# Altium PCB PCB_modified.PcbDoc
Units mil, origin at the board's own origin, x right, y up, seen from the top; angles counter-clockwise.
Board outline 3622.05 x 3622.05 mil, 2 copper layers (Top Layer, Bottom Layer); 1 components, 3 nets, 5 pads, 0 vias.
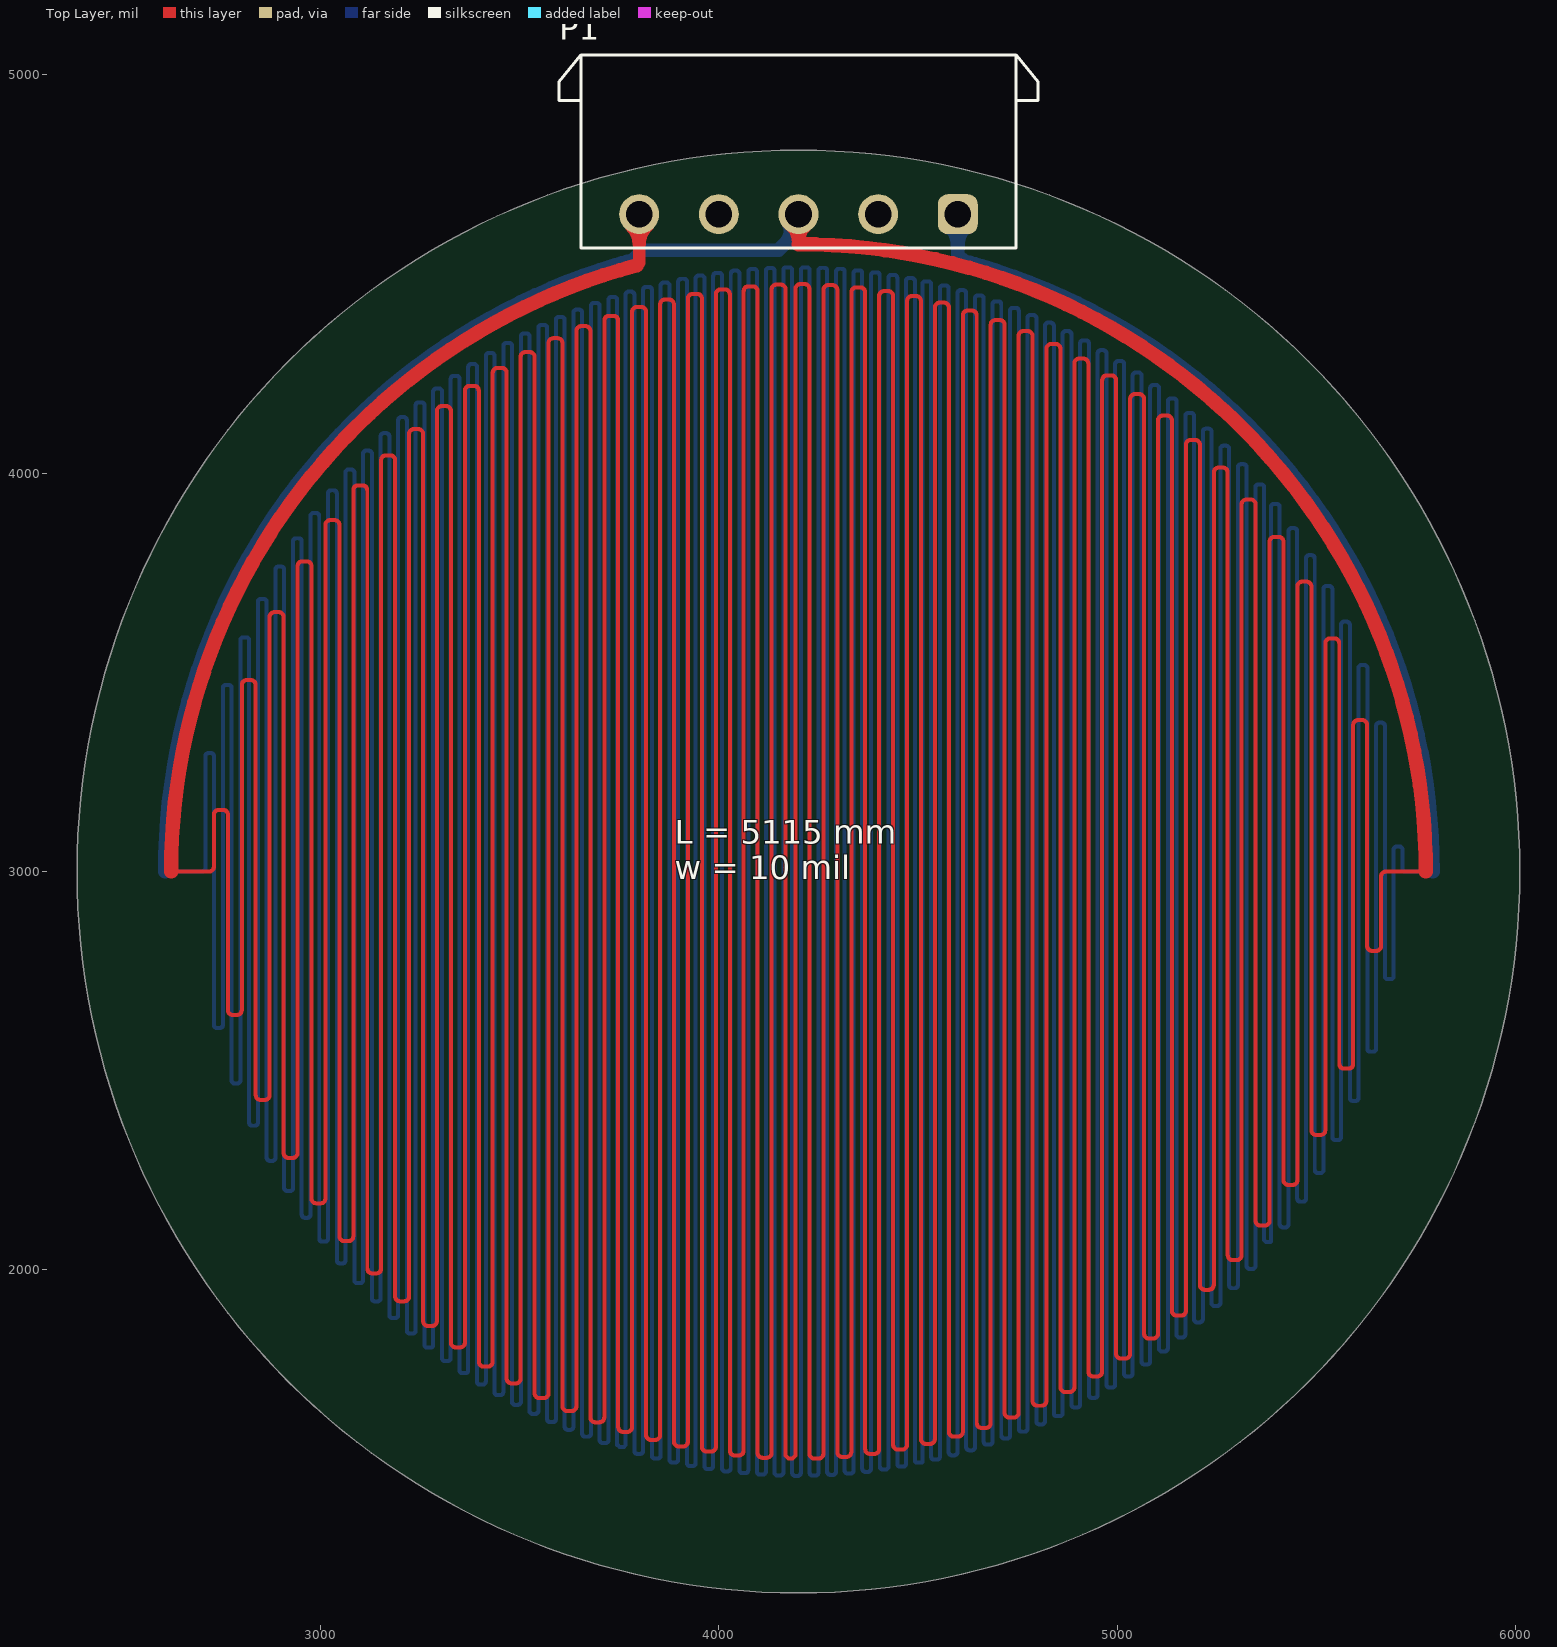
[diagram p0: Top Layer view]
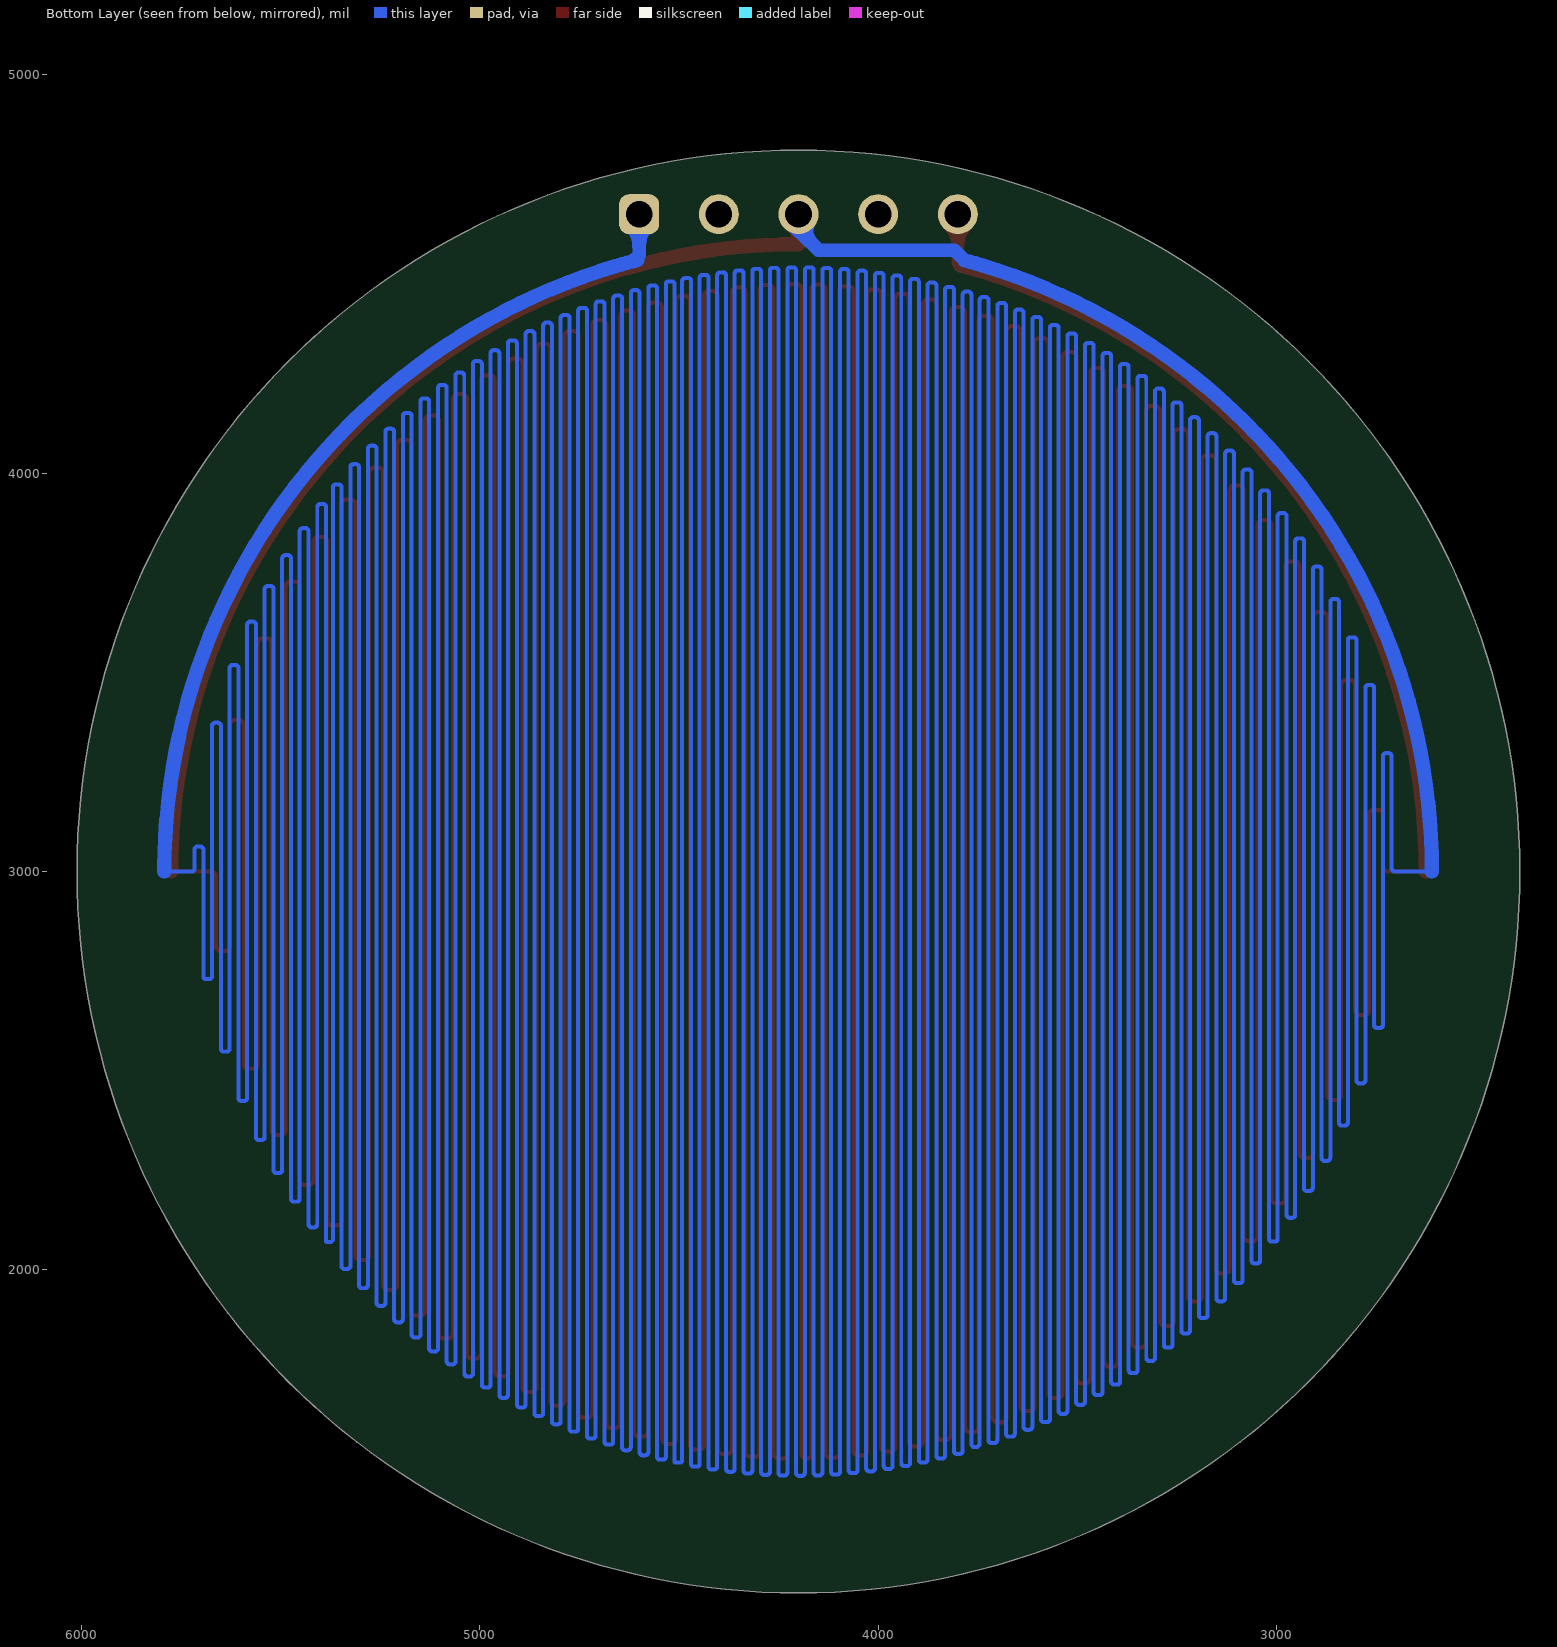
[diagram p1: Bottom Layer view, seen from below]

## Layer stack, top to bottom
Top Solder: solder mask 0.4, Solder Resist, Dk 3.5
Top Layer: signal copper 1.4
Dielectric 1: dielectric 12.6, FR-4, Dk 4.8
Bottom Layer: signal copper 1.4
Bottom Solder: solder mask 0.4, Solder Resist, Dk 3.5

## Board outline
2388.98,3000 ccw(c4200,3000) 4200,1188.98 ccw(c4200,3000) 6011.02,3000 ccw(c4200,3000) 4200,4811.02 ccw(c4200,3000)

## Design rules (kind name [scope] priority, off if disabled: settings)
Clearance [All] p1: gap=10
PolygonConnect [All] p1: connectstyle=Relief reliefconductorwidth=10 reliefentries=4 polygonreliefangle="90 Angle" airgapwidth=10
RoutingVias [All] p1: holewidth=28 width=50 viastyle="Through Hole" minholewidth=28 minwidth=50 maxholewidth=28 maxwidth=50
SolderMaskExpansion [All] p1: expansion=4
Width [All] p1: maxlimit=36 minlimit=9 preferedwidth=16 minimp=50.000000 maximp=50.000000 favimp=50.000000
30 further rules are at their usual default settings.

## Components (designator, comment, footprint, x,y, rotation, side; value= is the part's Value field where it differs from the comment)
P1 "691305540005" 691305540005 4200,4807.48 r180 top

## Footprints (in the part's own frame and the unit in brackets; to place one, negate y for a bottom-side part, rotate by r counter-clockwise, add the part's x,y. Pads: shape width x height; smd on the part's side, far side on the other; paste and mask are expansions set on the pad)
691305540005 [mm] "5,08mm - PCB Header Horizontal Entry with Plastic Latches - 05p"
  rrect50% 2.55x2.55 hole 1.7: 1(-10.16,4)
  round 2.55 hole 1.7: 2(-5.08,4) 3(0,4) 4(5.08,4) 5(10.16,4)
  silkscreen extent -15.27,-6.15 15.27,6.15, body extent -15.1,-6 15.1,6, height 8.63

## Part data
P1: library part CMP-03913-99613978-1, "691305540005 Terminal Block, R/A Header, 5Pos, Th Rohs Compliant: Yes"

## Nets (pads, with @x,y where several pads share a name; then routed paths per layer and width w, separated by ;. In a path a pad name is that pad's centre, name@x,y a point inside that pad or via, vN(x,y) a via of type N, cw(c..) or ccw(c..) an arc to the next point about the centre after c; other vN are vias at no path point)
FUSE_1: P1.2
FUSE_2: P1.4
NetP1_1: P1.1 P1.3 P1.5 | length 535731.7
  Top Layer w10: 2625.2,3000 2720.25,3000 ccw(c2720.25,3012.25) 2732.5,3012.25 2732.5,3142.74 cw(c2744.75,3142.74) 2744.75,3154.99 2755.25,3154.99 cw(c2755.25,3142.74) 2767.5,3142.74 2767.5,2652.13 ccw(c2779.75,2652.13) 2779.75,2639.88 2790.25,2639.88 ccw(c2790.25,2652.13) 2802.5,2652.13 2802.5,3468.2 cw(c2814.75,3468.2) 2814.75,3480.45 2825.25,3480.45 cw(c2825.25,3468.2) 2837.5,3468.2 2837.5,2438.8 ccw(c2849.75,2438.8) 2849.75,2426.55 2860.25,2426.55 ccw(c2860.25,2438.8) 2872.5,2438.8 2872.5,3638.94 cw(c2884.75,3638.94) 2884.75,3651.19 2895.25,3651.19 cw(c2895.25,3638.94) 2907.5,3638.94 2907.5,2293.54 ccw(c2919.75,2293.54) 2919.75,2281.29 2930.25,2281.29 ccw(c2930.25,2293.54) 2942.5,2293.54 2942.5,3766.47 cw(c2954.75,3766.47) 2954.75,3778.72 2965.25,3778.72 cw(c2965.25,3766.47) 2977.5,3766.47 2977.5,2179.38 ccw(c2989.75,2179.38) 2989.75,2167.13 3000.25,2167.13 ccw(c3000.25,2179.38) 3012.5,2179.38 3012.5,3870.01 cw(c3024.75,3870.01) 3024.75,3882.26 3035.25,3882.26 cw(c3035.25,3870.01) 3047.5,3870.01 3047.5,2084.6 ccw(c3059.75,2084.6) 3059.75,2072.35 3070.25,2072.35 ccw(c3070.25,2084.6) 3082.5,2084.6 3082.5,3957.36 cw(c3094.75,3957.36) 3094.75,3969.61 3105.25,3969.61 cw(c3105.25,3957.36) 3117.5,3957.36 3117.5,2003.66 ccw(c3129.75,2003.66) 3129.75,1991.41 3140.25,1991.41 ccw(c3140.25,2003.66) 3152.5,2003.66 3152.5,4032.66 cw(c3164.75,4032.66) 3164.75,4044.91 3175.25,4044.91 cw(c3175.25,4032.66) 3187.5,4032.66 3187.5,1933.4 ccw(c3199.75,1933.4) 3199.75,1921.15 3210.25,1921.15 ccw(c3210.25,1933.4) 3222.5,1933.4 3222.5,4098.37 cw(c3234.75,4098.37) 3234.75,4110.62 3245.25,4110.62 cw(c3245.25,4098.37) 3257.5,4098.37 3257.5,1871.83 ccw(c3269.75,1871.83) 3269.75,1859.58 3280.25,1859.58 ccw(c3280.25,1871.83) 3292.5,1871.83 3292.5,4156.14 cw(c3304.75,4156.14) 3304.75,4168.39 3315.25,4168.39 cw(c3315.25,4156.14) 3327.5,4156.14 3327.5,1817.59 ccw(c3339.75,1817.59) 3339.75,1805.34 3350.25,1805.34 ccw(c3350.25,1817.59) 3362.5,1817.59 3362.5,4207.1 cw(c3374.75,4207.1) 3374.75,4219.35 3385.25,4219.35 cw(c3385.25,4207.1) 3397.5,4207.1 3397.5,1769.7 ccw(c3409.75,1769.7) 3409.75,1757.45 3420.25,1757.45 ccw(c3420.25,1769.7) 3432.5,1769.7 3432.5,4252.09 cw(c3444.75,4252.09) 3444.75,4264.34 3455.25,4264.34 cw(c3455.25,4252.09) 3467.5,4252.09 3467.5,1727.46 ccw(c3479.75,1727.46) 3479.75,1715.21 3490.25,1715.21 ccw(c3490.25,1727.46) 3502.5,1727.46 3502.5,4291.73 cw(c3514.75,4291.73) 3514.75,4303.98 3525.25,4303.98 cw(c3525.25,4291.73) 3537.5,4291.73 3537.5,1690.31 ccw(c3549.75,1690.31) 3549.75,1678.06 3560.25,1678.06 ccw(c3560.25,1690.31) 3572.5,1690.31 3572.5,4326.5 cw(c3584.75,4326.5) 3584.75,4338.75 3595.25,4338.75 cw(c3595.25,4326.5) 3607.5,4326.5 3607.5,1657.82 ccw(c3619.75,1657.82) 3619.75,1645.57 3630.25,1645.57 ccw(c3630.25,1657.82) 3642.5,1657.82 3642.5,4356.77 cw(c3654.75,4356.77) 3654.75,4369.02 3665.25,4369.02 cw(c3665.25,4356.77) 3677.5,4356.77 3677.5,1629.68 ccw(c3689.75,1629.68) 3689.75,1617.43 3700.25,1617.43 ccw(c3700.25,1629.68) 3712.5,1629.68 3712.5,4382.85 cw(c3724.75,4382.85) 3724.75,4395.1 3735.25,4395.1 cw(c3735.25,4382.85) 3747.5,4382.85 3747.5,1605.62 ccw(c3759.75,1605.62) 3759.75,1593.37 3770.25,1593.37 ccw(c3770.25,1605.62) 3782.5,1605.62 3782.5,4404.95 cw(c3794.75,4404.95) 3794.75,4417.2 3805.25,4417.2 cw(c3805.25,4404.95) 3817.5,4404.95 3817.5,1585.42 ccw(c3829.75,1585.42) 3829.75,1573.17 3840.25,1573.17 ccw(c3840.25,1585.42) 3852.5,1585.42 3852.5,4423.28 cw(c3864.75,4423.28) 3864.75,4435.53 3875.25,4435.53 cw(c3875.25,4423.28) 3887.5,4423.28 3887.5,1568.93 ccw(c3899.75,1568.93) 3899.75,1556.68 3910.25,1556.68 ccw(c3910.25,1568.93) 3922.5,1568.93 3922.5,4437.97 cw(c3934.75,4437.97) 3934.75,4450.22 3945.25,4450.22 cw(c3945.25,4437.97) 3957.5,4437.97 3957.5,1556.01 ccw(c3969.75,1556.01) 3969.75,1543.76 3980.25,1543.76 ccw(c3980.25,1556.01) 3992.5,1556.01 3992.5,4449.14 cw(c4004.75,4449.14) 4004.75,4461.39 4015.25,4461.39 cw(c4015.25,4449.14) 4027.5,4449.14 4027.5,1546.57 ccw(c4039.75,1546.57) 4039.75,1534.32 4050.25,1534.32 ccw(c4050.25,1546.57) 4062.5,1546.57 4062.5,4456.86 cw(c4074.75,4456.86) 4074.75,4469.11 4085.25,4469.11 cw(c4085.25,4456.86) 4097.5,4456.86 4097.5,1540.55 ccw(c4109.75,1540.55) 4109.75,1528.3 4120.25,1528.3 ccw(c4120.25,1540.55) 4132.5,1540.55 4132.5,4461.19 cw(c4144.75,4461.19) 4144.75,4473.44 4155.25,4473.44 cw(c4155.25,4461.19) 4167.5,4461.19 4167.5,1534 4175,1526.5 4185,1526.5 4192.5,1534 4192.5,4462.15 cw(c4204.75,4462.15) 4204.75,4474.4 4215.25,4474.4 cw(c4215.25,4462.15) 4227.5,4462.15 4227.5,1538.63 ccw(c4239.75,1538.63) 4239.75,1526.38 4250.25,1526.38 ccw(c4250.25,1538.63) 4262.5,1538.63 4262.5,4459.75 cw(c4274.75,4459.75) 4274.75,4472 4285.25,4472 cw(c4285.25,4459.75) 4297.5,4459.75 4297.5,1542.72 ccw(c4309.75,1542.72) 4309.75,1530.47 4320.25,1530.47 ccw(c4320.25,1542.72) 4332.5,1542.72 4332.5,4453.97 cw(c4344.75,4453.97) 4344.75,4466.22 4355.25,4466.22 cw(c4355.25,4453.97) 4367.5,4453.97 4367.5,1550.2 ccw(c4379.75,1550.2) 4379.75,1537.95 4390.25,1537.95 ccw(c4390.25,1550.2) 4402.5,1550.2 4402.5,4444.78 cw(c4414.75,4444.78) 4414.75,4457.03 4425.25,4457.03 cw(c4425.25,4444.78) 4437.5,4444.78 4437.5,1561.11 ccw(c4449.75,1561.11) 4449.75,1548.86 4460.25,1548.86 ccw(c4460.25,1561.11) 4472.5,1561.11 4472.5,4432.11 cw(c4484.75,4432.11) 4484.75,4444.36 4495.25,4444.36 cw(c4495.25,4432.11) 4507.5,4432.11 4507.5,1575.55 ccw(c4519.75,1575.55) 4519.75,1563.3 4530.25,1563.3 ccw(c4530.25,1575.55) 4542.5,1575.55 4542.5,4415.88 cw(c4554.75,4415.88) 4554.75,4428.13 4565.25,4428.13 cw(c4565.25,4415.88) 4577.5,4415.88 4577.5,1593.61 ccw(c4589.75,1593.61) 4589.75,1581.36 4600.25,1581.36 ccw(c4600.25,1593.61) 4612.5,1593.61 4612.5,4395.95 cw(c4624.75,4395.95) 4624.75,4408.2 4635.25,4408.2 cw(c4635.25,4395.95) 4647.5,4395.95 4647.5,1615.45 ccw(c4659.75,1615.45) 4659.75,1603.2 4670.25,1603.2 ccw(c4670.25,1615.45) 4682.5,1615.45 4682.5,4372.17 cw(c4694.75,4372.17) 4694.75,4384.42 4705.25,4384.42 cw(c4705.25,4372.17) 4717.5,4372.17 4717.5,1641.23 ccw(c4729.75,1641.23) 4729.75,1628.98 4740.25,1628.98 ccw(c4740.25,1641.23) 4752.5,1641.23 4752.5,4344.33 cw(c4764.75,4344.33) 4764.75,4356.58 4775.25,4356.58 cw(c4775.25,4344.33) 4787.5,4344.33 4787.5,1671.2 ccw(c4799.75,1671.2) 4799.75,1658.95 4810.25,1658.95 ccw(c4810.25,1671.2) 4822.5,1671.2 4822.5,4312.17 cw(c4834.75,4312.17) 4834.75,4324.42 4845.25,4324.42 cw(c4845.25,4312.17) 4857.5,4312.17 4857.5,1705.63 ccw(c4869.75,1705.63) 4869.75,1693.38 4880.25,1693.38 ccw(c4880.25,1705.63) 4892.5,1705.63 4892.5,4275.36 cw(c4904.75,4275.36) 4904.75,4287.61 4915.25,4287.61 cw(c4915.25,4275.36) 4927.5,4275.36 4927.5,1744.91 ccw(c4939.75,1744.91) 4939.75,1732.66 4950.25,1732.66 ccw(c4950.25,1744.91) 4962.5,1744.91 4962.5,4233.49 cw(c4974.75,4233.49) 4974.75,4245.74 4985.25,4245.74 cw(c4985.25,4233.49) 4997.5,4233.49 4997.5,1789.5 ccw(c5009.75,1789.5) 5009.75,1777.25 5020.25,1777.25 ccw(c5020.25,1789.5) 5032.5,1789.5 5032.5,4186.03 cw(c5044.75,4186.03) 5044.75,4198.28 5055.25,4198.28 cw(c5055.25,4186.03) 5067.5,4186.03 5067.5,1840.01 ccw(c5079.75,1840.01) 5079.75,1827.76 5090.25,1827.76 ccw(c5090.25,1840.01) 5102.5,1840.01 5102.5,4132.27 cw(c5114.75,4132.27) 5114.75,4144.52 5125.25,4144.52 cw(c5125.25,4132.27) 5137.5,4132.27 5137.5,1897.26 ccw(c5149.75,1897.26) 5149.75,1885.01 5160.25,1885.01 ccw(c5160.25,1897.26) 5172.5,1897.26 5172.5,4071.26 cw(c5184.75,4071.26) 5184.75,4083.51 5195.25,4083.51 cw(c5195.25,4071.26) 5207.5,4071.26 5207.5,1962.35 ccw(c5219.75,1962.35) 5219.75,1950.1 5230.25,1950.1 ccw(c5230.25,1962.35) 5242.5,1962.35 5242.5,4001.68 cw(c5254.75,4001.68) 5254.75,4013.93 5265.25,4013.93 cw(c5265.25,4001.68) 5277.5,4001.68 5277.5,2036.89 ccw(c5289.75,2036.89) 5289.75,2024.64 5300.25,2024.64 ccw(c5300.25,2036.89) 5312.5,2036.89 5312.5,3921.59 cw(c5324.75,3921.59) 5324.75,3933.84 5335.25,3933.84 cw(c5335.25,3921.59) 5347.5,3921.59 5347.5,2123.28 ccw(c5359.75,2123.28) 5359.75,2111.03 5370.25,2111.03 ccw(c5370.25,2123.28) 5382.5,2123.28 5382.5,3827.95 cw(c5394.75,3827.95) 5394.75,3840.2 5405.25,3840.2 cw(c5405.25,3827.95) 5417.5,3827.95 5417.5,2225.46 ccw(c5429.75,2225.46) 5429.75,2213.21 5440.25,2213.21 ccw(c5440.25,2225.46) 5452.5,2225.46 5452.5,3715.45 cw(c5464.75,3715.45) 5464.75,3727.7 5475.25,3727.7 cw(c5475.25,3715.45) 5487.5,3715.45 5487.5,2350.87 ccw(c5499.75,2350.87) 5499.75,2338.62 5510.25,2338.62 ccw(c5510.25,2350.87) 5522.5,2350.87 5522.5,3573.09 cw(c5534.75,3573.09) 5534.75,3585.34 5545.25,3585.34 cw(c5545.25,3573.09) 5557.5,3573.09 5557.5,2517.26 ccw(c5569.75,2517.26) 5569.75,2505.01 5580.25,2505.01 ccw(c5580.25,2517.26) 5592.5,2517.26 5592.5,3367.69 cw(c5604.75,3367.69) 5604.75,3379.94 5615.25,3379.94 cw(c5615.25,3367.69) 5627.5,3367.69 5627.5,2813.18 ccw(c5639.75,2813.18) 5639.75,2800.93 5650.25,2800.93 ccw(c5650.25,2813.18) 5662.5,2813.18 5662.5,2987.75 cw(c5674.75,2987.75) 5674.75,3000 5774.8,3000
  Top Layer w32: 3792.41,4521.14 3800,4528.73 P1.5 ; 4200,4574.8 P1.3
  Top Layer w36: 2625.2,3000 cw(c4200,3000) 2625.44,3027.48 ; 2625.2,3000 cw(c4200,3000) 2625.44,3027.48 ; 2625.2,3000 cw(c4200,3000) 2625.44,3027.48 ; 2625.2,3000 cw(c4200,3000) 3792.41,4521.14 ; 3765.93,4513.8 cw(c4200,3000) 3792.41,4521.14 ; 3765.93,4513.8 cw(c4200,3000) 3792.41,4521.14 ; 3765.93,4513.8 cw(c4200,3000) 3792.41,4521.14 ; 3792.41,4521.14 cw(c4200,3000) 3794.23,4521.63 ; 3792.41,4521.14 cw(c4200,3000) 3794.23,4521.63 ; 3792.41,4521.14 cw(c4200,3000) 3794.23,4521.63 ; 3792.41,4521.14 cw(c4200,3000) 3794.23,4521.63 ; 4200,4574.8 cw(c4200,3000) 4227.48,4574.56 ; 4200,4574.8 cw(c4200,3000) 4227.48,4574.56 ; 4200,4574.8 cw(c4200,3000) 4227.48,4574.56 ; 4200,4574.8 cw(c4200,3000) 5774.8,3000 ; 5774.56,3027.48 cw(c4200,3000) 5774.8,3000 ; 5774.56,3027.48 cw(c4200,3000) 5774.8,3000 ; 5774.56,3027.48 cw(c4200,3000) 5774.8,3000
  Bottom Layer w10: 2610,3000 2703.3,3000 ccw(c2703.3,3007.7) 2711,3007.7 2711,3289.38 cw(c2718.7,3289.38) 2718.7,3297.08 2725.3,3297.08 cw(c2725.3,3289.38) 2733,3289.38 2733,2614.73 ccw(c2740.7,2614.73) 2740.7,2607.03 2747.3,2607.03 ccw(c2747.3,2614.73) 2755,2614.73 2755,3460.61 cw(c2762.7,3460.61) 2762.7,3468.31 2769.3,3468.31 cw(c2769.3,3460.61) 2777,3460.61 2777,2475.67 ccw(c2784.7,2475.67) 2784.7,2467.97 2791.3,2467.97 ccw(c2791.3,2475.67) 2799,2475.67 2799,3580.26 cw(c2806.7,3580.26) 2806.7,3587.96 2813.3,3587.96 cw(c2813.3,3580.26) 2821,3580.26 2821,2369.5 ccw(c2828.7,2369.5) 2828.7,2361.8 2835.3,2361.8 ccw(c2835.3,2369.5) 2843,2369.5 2843,3676.3 cw(c2850.7,3676.3) 2850.7,3684 2857.3,3684 cw(c2857.3,3676.3) 2865,3676.3 2865,2281.48 ccw(c2872.7,2281.48) 2872.7,2273.78 2879.3,2273.78 ccw(c2879.3,2281.48) 2887,2281.48 2887,3757.75 cw(c2894.7,3757.75) 2894.7,3765.45 2901.3,3765.45 cw(c2901.3,3757.75) 2909,3757.75 2909,2205.56 ccw(c2916.7,2205.56) 2916.7,2197.86 2923.3,2197.86 ccw(c2923.3,2205.56) 2931,2205.56 2931,3828.92 cw(c2938.7,3828.92) 2938.7,3836.62 2945.3,3836.62 cw(c2945.3,3828.92) 2953,3828.92 2953,2138.53 ccw(c2960.7,2138.53) 2960.7,2130.83 2967.3,2130.83 ccw(c2967.3,2138.53) 2975,2138.53 2975,3892.29 cw(c2982.7,3892.29) 2982.7,3899.99 2989.3,3899.99 cw(c2989.3,3892.29) 2997,3892.29 2997,2078.45 ccw(c3004.7,2078.45) 3004.7,2070.75 3011.3,2070.75 ccw(c3011.3,2078.45) 3019,2078.45 3019,3949.4 cw(c3026.7,3949.4) 3026.7,3957.1 3033.3,3957.1 cw(c3033.3,3949.4) 3041,3949.4 3041,2024.04 ccw(c3048.7,2024.04) 3048.7,2016.34 3055.3,2016.34 ccw(c3055.3,2024.04) 3063,2024.04 3063,4001.34 cw(c3070.7,4001.34) 3070.7,4009.04 3077.3,4009.04 cw(c3077.3,4001.34) 3085,4001.34 3085,1974.39 ccw(c3092.7,1974.39) 3092.7,1966.69 3099.3,1966.69 ccw(c3099.3,1974.39) 3107,1974.39 3107,4048.86 cw(c3114.7,4048.86) 3114.7,4056.56 3121.3,4056.56 cw(c3121.3,4048.86) 3129,4048.86 3129,1928.84 ccw(c3136.7,1928.84) 3136.7,1921.14 3143.3,1921.14 ccw(c3143.3,1928.84) 3151,1928.84 3151,4092.56 cw(c3158.7,4092.56) 3158.7,4100.26 3165.3,4100.26 cw(c3165.3,4092.56) 3173,4092.56 3173,1886.89 ccw(c3180.7,1886.89) 3180.7,1879.19 3187.3,1879.19 ccw(c3187.3,1886.89) 3195,1886.89 3195,4132.87 cw(c3202.7,4132.87) 3202.7,4140.57 3209.3,4140.57 cw(c3209.3,4132.87) 3217,4132.87 3217,1848.14 ccw(c3224.7,1848.14) 3224.7,1840.44 3231.3,1840.44 ccw(c3231.3,1848.14) 3239,1848.14 3239,4170.13 cw(c3246.7,4170.13) 3246.7,4177.83 3253.3,4177.83 cw(c3253.3,4170.13) 3261,4170.13 3261,1812.28 ccw(c3268.7,1812.28) 3268.7,1804.58 3275.3,1804.58 ccw(c3275.3,1812.28) 3283,1812.28 3283,4204.64 cw(c3290.7,4204.64) 3290.7,4212.34 3297.3,4212.34 cw(c3297.3,4204.64) 3305,4204.64 3305,1779.06 ccw(c3312.7,1779.06) 3312.7,1771.36 3319.3,1771.36 ccw(c3319.3,1779.06) 3327,1779.06 3327,4236.63 cw(c3334.7,4236.63) 3334.7,4244.33 3341.3,4244.33 cw(c3341.3,4236.63) 3349,4236.63 3349,1748.27 ccw(c3356.7,1748.27) 3356.7,1740.57 3363.3,1740.57 ccw(c3363.3,1748.27) 3371,1748.27 3371,4266.28 cw(c3378.7,4266.28) 3378.7,4273.98 3385.3,4273.98 cw(c3385.3,4266.28) 3393,4266.28 3393,1719.72 ccw(c3400.7,1719.72) 3400.7,1712.02 3407.3,1712.02 ccw(c3407.3,1719.72) 3415,1719.72 3415,4293.75 cw(c3422.7,4293.75) 3422.7,4301.45 3429.3,4301.45 cw(c3429.3,4293.75) 3437,4293.75 3437,1693.28 ccw(c3444.7,1693.28) 3444.7,1685.58 3451.3,1685.58 ccw(c3451.3,1693.28) 3459,1693.28 3459,4319.19 cw(c3466.7,4319.19) 3466.7,4326.89 3473.3,4326.89 cw(c3473.3,4319.19) 3481,4319.19 3481,1668.82 ccw(c3488.7,1668.82) 3488.7,1661.12 3495.3,1661.12 ccw(c3495.3,1668.82) 3503,1668.82 3503,4342.71 cw(c3510.7,4342.71) 3510.7,4350.41 3517.3,4350.41 cw(c3517.3,4342.71) 3525,4342.71 3525,1646.23 ccw(c3532.7,1646.23) 3532.7,1638.53 3539.3,1638.53 ccw(c3539.3,1646.23) 3547,1646.23 3547,4364.4 cw(c3554.7,4364.4) 3554.7,4372.1 3561.3,4372.1 cw(c3561.3,4364.4) 3569,4364.4 3569,1625.41 ccw(c3576.7,1625.41) 3576.7,1617.71 3583.3,1617.71 ccw(c3583.3,1625.41) 3591,1625.41 3591,4384.35 cw(c3598.7,4384.35) 3598.7,4392.05 3605.3,4392.05 cw(c3605.3,4384.35) 3613,4384.35 3613,1606.3 ccw(c3620.7,1606.3) 3620.7,1598.6 3627.3,1598.6 ccw(c3627.3,1606.3) 3635,1606.3 3635,4402.64 cw(c3642.7,4402.64) 3642.7,4410.34 3649.3,4410.34 cw(c3649.3,4402.64) 3657,4402.64 3657,1588.81 ccw(c3664.7,1588.81) 3664.7,1581.11 3671.3,1581.11 ccw(c3671.3,1588.81) 3679,1588.81 3679,4419.34 cw(c3686.7,4419.34) 3686.7,4427.04 3693.3,4427.04 cw(c3693.3,4419.34) 3701,4419.34 3701,1572.9 ccw(c3708.7,1572.9) 3708.7,1565.2 3715.3,1565.2 ccw(c3715.3,1572.9) 3723,1572.9 3723,4434.49 cw(c3730.7,4434.49) 3730.7,4442.19 3737.3,4442.19 cw(c3737.3,4434.49) 3745,4434.49 3745,1560 3746.43,1560 3750.72,1555.72 3761.72,1555.72 3766,1560 3766,4447.85 cw(c3773.7,4447.85) 3773.7,4455.55 3780.3,4455.55 cw(c3780.3,4447.85) 3788,4447.85 3788,1545.86 ccw(c3795.7,1545.86) 3795.7,1538.16 3802.3,1538.16 ccw(c3802.3,1545.86) 3810,1545.86 3810,4460.08 cw(c3817.7,4460.08) 3817.7,4467.78 3824.3,4467.78 cw(c3824.3,4460.08) 3832,4460.08 3832,1534.33 ccw(c3839.7,1534.33) 3839.7,1526.63 3846.3,1526.63 ccw(c3846.3,1534.33) 3854,1534.33 3854,4470.9 cw(c3861.7,4470.9) 3861.7,4478.6 3868.3,4478.6 cw(c3868.3,4470.9) 3876,4470.9 3876,1524.21 ccw(c3883.7,1524.21) 3883.7,1516.51 3890.3,1516.51 ccw(c3890.3,1524.21) 3898,1524.21 3898,4480.33 cw(c3905.7,4480.33) 3905.7,4488.03 3912.3,4488.03 cw(c3912.3,4480.33) 3920,4480.33 3920,1515.47 ccw(c3927.7,1515.47) 3927.7,1507.77 3934.3,1507.77 ccw(c3934.3,1515.47) 3942,1515.47 3942,4488.4 cw(c3949.7,4488.4) 3949.7,4496.1 3956.3,4496.1 cw(c3956.3,4488.4) 3964,4488.4 3964,1508.06 ccw(c3971.7,1508.06) 3971.7,1500.36 3978.3,1500.36 ccw(c3978.3,1508.06) 3986,1508.06 3986,4495.14 cw(c3993.7,4495.14) 3993.7,4502.84 4000.3,4502.84 cw(c4000.3,4495.14) 4008,4495.14 4008,1501.99 ccw(c4015.7,1501.99) 4015.7,1494.29 4022.3,1494.29 ccw(c4022.3,1501.99) 4030,1501.99 4030,4500.55 cw(c4037.7,4500.55) 4037.7,4508.25 4044.3,4508.25 cw(c4044.3,4500.55) 4052,4500.55 4052,1497.23 ccw(c4059.7,1497.23) 4059.7,1489.53 4066.3,1489.53 ccw(c4066.3,1497.23) 4074,1497.23 4074,4504.66 cw(c4081.7,4504.66) 4081.7,4512.36 4088.3,4512.36 cw(c4088.3,4504.66) 4096,4504.66 4096,1493.77 ccw(c4103.7,1493.77) 4103.7,1486.07 4110.3,1486.07 ccw(c4110.3,1493.77) 4118,1493.77 4118,4507.47 cw(c4125.7,4507.47) 4125.7,4515.17 4132.3,4515.17 cw(c4132.3,4507.47) 4140,4507.47 4140,1491.61 ccw(c4147.7,1491.61) 4147.7,1483.9 4154.3,1483.9 ccw(c4154.3,1491.61) 4162,1491.61 4162,4509 cw(c4169.7,4509) 4169.7,4516.7 4176.3,4516.7 cw(c4176.3,4509) 4184,4509 4184,1490.72 ccw(c4191.7,1490.72) 4191.7,1483.02 4198.3,1483.02 ccw(c4198.3,1490.72) 4206,1490.72 4206,4509.16 cw(c4213.7,4509.16) 4213.7,4516.86 4220.3,4516.86 cw(c4220.3,4509.16) 4228,4509.16 4228,1491.29 ccw(c4235.7,1491.29) 4235.7,1483.59 4242.3,1483.59 ccw(c4242.3,1491.29) 4250,1491.29 4250,4507.93 cw(c4257.7,4507.93) 4257.7,4515.63 4264.3,4515.63 cw(c4264.3,4507.93) 4272,4507.93 4272,1493.17 ccw(c4279.7,1493.17) 4279.7,1485.47 4286.3,1485.47 ccw(c4286.3,1493.17) 4294,1493.17 4294,4505.41 cw(c4301.7,4505.41) 4301.7,4513.11 4308.3,4513.11 cw(c4308.3,4505.41) 4316,4505.41 4316,1496.33 ccw(c4323.7,1496.33) 4323.7,1488.63 4330.3,1488.63 ccw(c4330.3,1496.33) 4338,1496.33 4338,4501.6 cw(c4345.7,4501.6) 4345.7,4509.3 4352.3,4509.3 cw(c4352.3,4501.6) 4360,4501.6 4360,1500.8 ccw(c4367.7,1500.8) 4367.7,1493.1 4374.3,1493.1 ccw(c4374.3,1500.8) 4382,1500.8 4382,4496.48 cw(c4389.7,4496.48) 4389.7,4504.18 4396.3,4504.18 cw(c4396.3,4496.48) 4404,4496.48 4404,1506.57 ccw(c4411.7,1506.57) 4411.7,1498.87 4418.3,1498.87 ccw(c4418.3,1506.57) 4426,1506.57 4426,4490.05 cw(c4433.7,4490.05) 4433.7,4497.75 4440.3,4497.75 cw(c4440.3,4490.05) 4448,4490.05 4448,1513.67 ccw(c4455.7,1513.67) 4455.7,1505.97 4462.3,1505.97 ccw(c4462.3,1513.67) 4470,1513.67 4470,4482.28 cw(c4477.7,4482.28) 4477.7,4489.98 4484.3,4489.98 cw(c4484.3,4482.28) 4492,4482.28 4492,1519.42 4495,1516.42 4510,1516.42 4511,1517.42 4511,4473.83 cw(c4518.7,4473.83) 4518.7,4481.53 4525.3,4481.53 cw(c4525.3,4473.83) 4533,4473.83 4533,1531.2 ccw(c4540.7,1531.2) 4540.7,1523.5 4547.3,1523.5 ccw(c4547.3,1531.2) 4555,1531.2 4555,4463.42 cw(c4562.7,4463.42) 4562.7,4471.12 4569.3,4471.12 cw(c4569.3,4463.42) 4577,4463.42 4577,1542.3 ccw(c4584.7,1542.3) 4584.7,1534.6 4591.3,1534.6 ccw(c4591.3,1542.3) 4599,1542.3 4599,4451.61 cw(c4606.7,4451.61) 4606.7,4459.31 4613.3,4459.31 cw(c4613.3,4451.61) 4621,4451.61 4621,1554.83 ccw(c4628.7,1554.83) 4628.7,1547.13 4635.3,1547.13 ccw(c4635.3,1554.83) 4643,1554.83 4643,4438.36 cw(c4650.7,4438.36) 4650.7,4446.06 4657.3,4446.06 cw(c4657.3,4438.36) 4665,4438.36 4665,1568.82 ccw(c4672.7,1568.82) 4672.7,1561.12 4679.3,1561.12 ccw(c4679.3,1568.82) 4687,1568.82 4687,4423.62 cw(c4694.7,4423.62) 4694.7,4431.32 4701.3,4431.32 cw(c4701.3,4423.62) 4709,4423.62 4709,1584.32 ccw(c4716.7,1584.32) 4716.7,1576.62 4723.3,1576.62 ccw(c4723.3,1584.32) 4731,1584.32 4731,4407.35 cw(c4738.7,4407.35) 4738.7,4415.05 4745.3,4415.05 cw(c4745.3,4407.35) 4753,4407.35 4753,1601.37 ccw(c4760.7,1601.37) 4760.7,1593.67 4767.3,1593.67 ccw(c4767.3,1601.37) 4775,1601.37 4775,4389.5 cw(c4782.7,4389.5) 4782.7,4397.2 4789.3,4397.2 cw(c4789.3,4389.5) 4797,4389.5 4797,1620.03 ccw(c4804.7,1620.03) 4804.7,1612.33 4811.3,1612.33 ccw(c4811.3,1620.03) 4819,1620.03 4819,4370.01 cw(c4826.7,4370.01) 4826.7,4377.71 4833.3,4377.71 cw(c4833.3,4370.01) 4841,4370.01 4841,1640.38 ccw(c4848.7,1640.38) 4848.7,1632.68 4855.3,1632.68 ccw(c4855.3,1640.38) 4863,1640.38 4863,4348.8 cw(c4870.7,4348.8) 4870.7,4356.5 4877.3,4356.5 cw(c4877.3,4348.8) 4885,4348.8 4885,1662.48 ccw(c4892.7,1662.48) 4892.7,1654.78 4899.3,1654.78 ccw(c4899.3,1662.48) 4907,1662.48 4907,4325.79 cw(c4914.7,4325.79) 4914.7,4333.49 4921.3,4333.49 cw(c4921.3,4325.79) 4929,4325.79 4929,1686.42 ccw(c4936.7,1686.42) 4936.7,1678.72 4943.3,1678.72 ccw(c4943.3,1686.42) 4951,1686.42 4951,4300.89 cw(c4958.7,4300.89) 4958.7,4308.59 4965.3,4308.59 cw(c4965.3,4300.89) 4973,4300.89 4973,1712.31 ccw(c4980.7,1712.31) 4980.7,1704.61 4987.3,1704.61 ccw(c4987.3,1712.31) 4995,1712.31 4995,4273.98 cw(c5002.7,4273.98) 5002.7,4281.68 5009.3,4281.68 cw(c5009.3,4273.98) 5017,4273.98 5017,1740.27 ccw(c5024.7,1740.27) 5024.7,1732.57 5031.3,1732.57 ccw(c5031.3,1740.27) 5039,1740.27 5039,4244.94 cw(c5046.7,4244.94) 5046.7,4252.64 5053.3,4252.64 cw(c5053.3,4244.94) 5061,4244.94 5061,1770.43 ccw(c5068.7,1770.43) 5068.7,1762.73 5075.3,1762.73 ccw(c5075.3,1770.43) 5083,1770.43 5083,4213.61 cw(c5090.7,4213.61) 5090.7,4221.31 5097.3,4221.31 cw(c5097.3,4213.61) 5105,4213.61 5105,1802.97 ccw(c5112.7,1802.97) 5112.7,1795.27 5119.3,1795.27 ccw(c5119.3,1802.97) 5127,1802.97 5127,4179.81 cw(c5134.7,4179.81) 5134.7,4187.51 5141.3,4187.51 cw(c5141.3,4179.81) 5149,4179.81 5149,1838.09 ccw(c5156.7,1838.09) 5156.7,1830.39 5163.3,1830.39 ccw(c5163.3,1838.09) 5171,1838.09 5171,4143.32 cw(c5178.7,4143.32) 5178.7,4151.02 5185.3,4151.02 cw(c5185.3,4143.32) 5193,4143.32 5193,1876.02 ccw(c5200.7,1876.02) 5200.7,1868.32 5207.3,1868.32 ccw(c5207.3,1876.02) 5215,1876.02 5215,4103.87 cw(c5222.7,4103.87) 5222.7,4111.57 5229.3,4111.57 cw(c5229.3,4103.87) 5237,4103.87 5237,1917.06 ccw(c5244.7,1917.06) 5244.7,1909.36 5251.3,1909.36 ccw(c5251.3,1917.06) 5259,1917.06 5259,4061.14 cw(c5266.7,4061.14) 5266.7,4068.84 5273.3,4068.84 cw(c5273.3,4061.14) 5281,4061.14 5281,1961.58 ccw(c5288.7,1961.58) 5288.7,1953.88 5295.3,1953.88 ccw(c5295.3,1961.58) 5303,1961.58 5303,4014.71 cw(c5310.7,4014.71) 5310.7,4022.41 5317.3,4022.41 cw(c5317.3,4014.71) 5325,4014.71 5325,2010.06 ccw(c5332.7,2010.06) 5332.7,2002.36 5339.3,2002.36 ccw(c5339.3,2010.06) 5347,2010.06 5347,3964.04 cw(c5354.7,3964.04) 5354.7,3971.74 5361.3,3971.74 cw(c5361.3,3964.04) 5369,3964.04 5369,2075 5374,2070 5385,2070 5386,2071 5386,3915.03 cw(c5393.7,3915.03) 5393.7,3922.73 5400.3,3922.73 cw(c5400.3,3915.03) 5408,3915.03 5408,2114.58 ccw(c5415.7,2114.58) 5415.7,2106.88 5422.3,2106.88 ccw(c5422.3,2114.58) 5430,2114.58 5430,3854.23 cw(c5437.7,3854.23) 5437.7,3861.93 5444.3,3861.93 cw(c5444.3,3854.23) 5452,3854.23 5452,2178.73 ccw(c5459.7,2178.73) 5459.7,2171.03 5466.3,2171.03 ccw(c5466.3,2178.73) 5474,2178.73 5474,3786.3 cw(c5481.7,3786.3) 5481.7,3794 5488.3,3794 cw(c5488.3,3786.3) 5496,3786.3 5496,2250.93 ccw(c5503.7,2250.93) 5503.7,2243.23 5510.3,2243.23 ccw(c5510.3,2250.93) 5518,2250.93 5518,3709.2 cw(c5525.7,3709.2) 5525.7,3716.9 5532.3,3716.9 cw(c5532.3,3709.2) 5540,3709.2 5540,2333.77 ccw(c5547.7,2333.77) 5547.7,2326.07 5554.3,2326.07 ccw(c5554.3,2333.77) 5562,2333.77 5562,3619.51 cw(c5569.7,3619.51) 5569.7,3627.21 5576.3,3627.21 cw(c5576.3,3619.51) 5584,3619.51 5584,2431.89 ccw(c5591.7,2431.89) 5591.7,2424.19 5598.3,2424.19 ccw(c5598.3,2431.89) 5606,2431.89 5606,3510.63 cw(c5613.7,3510.63) 5613.7,3518.33 5620.3,3518.33 cw(c5620.3,3510.63) 5628,3510.63 5628,2555.3 ccw(c5635.7,2555.3) 5635.7,2547.6 5642.3,2547.59 ccw(c5642.3,2555.3) 5650,2555.3 5650,3365.81 cw(c5657.7,3365.81) 5657.7,3373.51 5664.3,3373.51 cw(c5664.3,3365.81) 5672,3365.81 5672,2737.5 ccw(c5679.7,2737.5) 5679.7,2729.8 5686.3,2729.8 ccw(c5686.3,2737.5) 5694,2737.5 5694,3054.99 cw(c5701.7,3054.99) 5701.7,3062.69 5708.3,3062.69 cw(c5708.3,3054.99) 5716,3054.99 5716,3007.7 ccw(c5723.7,3007.7) 5723.7,3000 5792,3000
  Bottom Layer w34: 3783.36,4534.44 3808.92,4560 4150,4560 4200,4610 P1.3 ; P1.1 4600,4548.45 4616.49,4531.96
  Bottom Layer w36: 2610.16,3022.45 ccw(c4200,3000) 2610,3000 cw(c4200,3000) 3783.36,4534.44 ccw(c4200,3000) 3756.65,4526.94 ; 4643.16,4524.56 ccw(c4206,3000) 4616.49,4531.96 ; 5791.76,3027.68 cw(c4206,3000) 5792,3000 ccw(c4206,3000) 4616.49,4531.96 ; 4616.49,4531.96 ccw(c4206,3000) 4603.96,4535.26 cw(c4206,3000) 4616.49,4531.96

## Silkscreen, mask and mechanical layers (free items; w line width, h text height)
Top Overlay:
  text "L = 5115 mm / w = 10 mil" at 3890,2980 h60
Mechanical 1:
  circle w10: c4200,3000 r1811.02